# Altium PCB lm2596PCB.PcbDoc
Units mm, origin at the board's own origin, x right, y up, seen from the top; angles counter-clockwise.
Board outline 52.58 x 24.89 mm, 2 copper layers (Top Layer, Bottom Layer); 9 components, 5 nets, 23 pads, 2 vias.
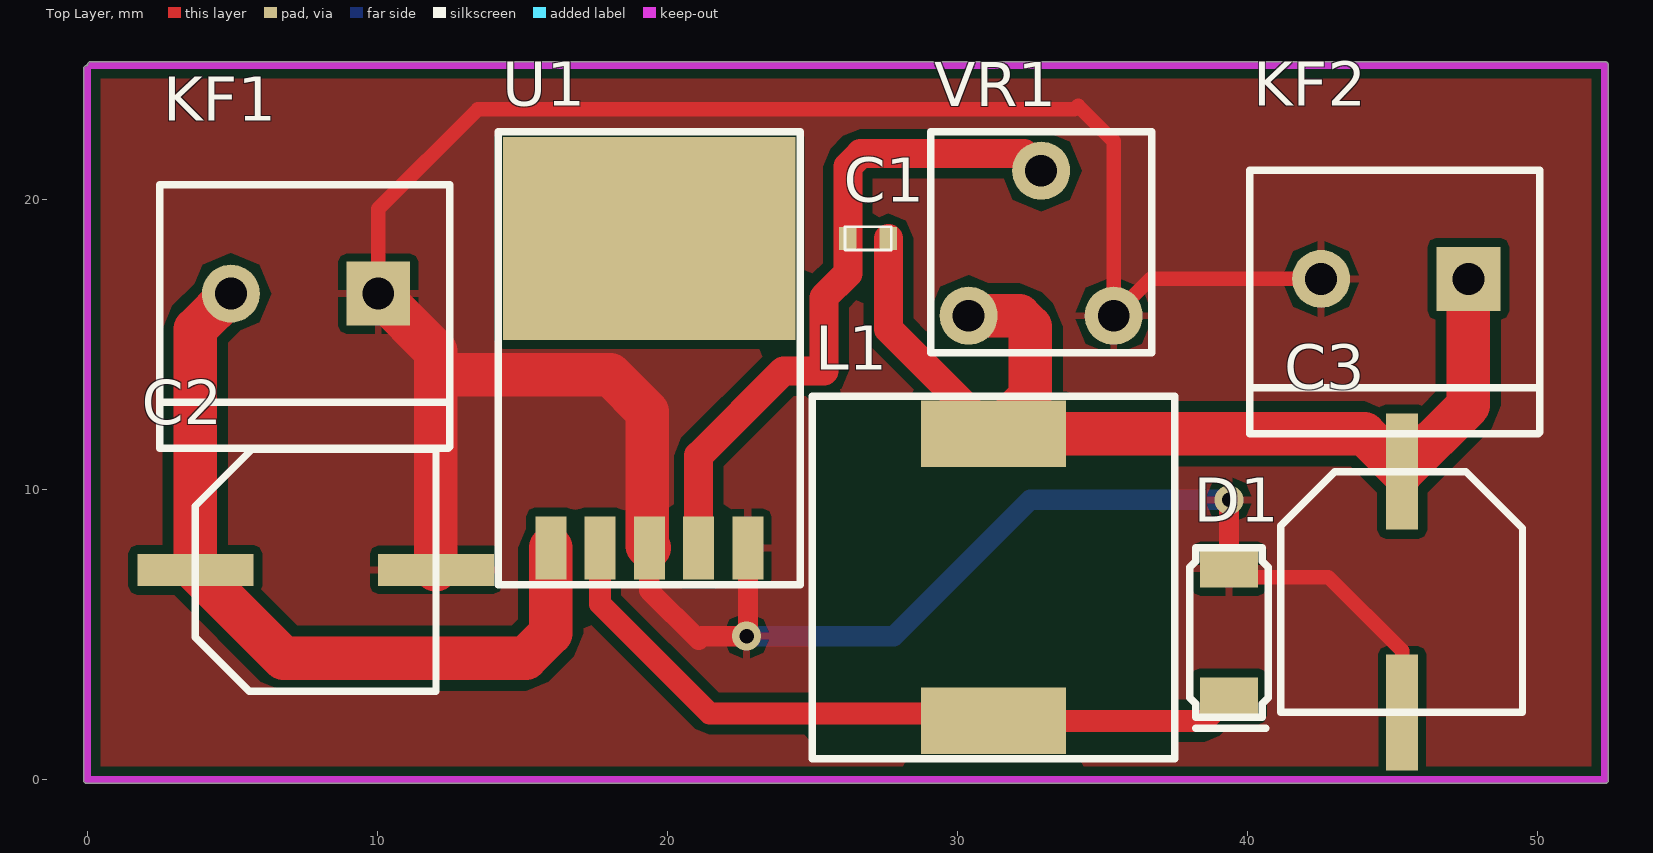
[diagram p0: Top Layer view]
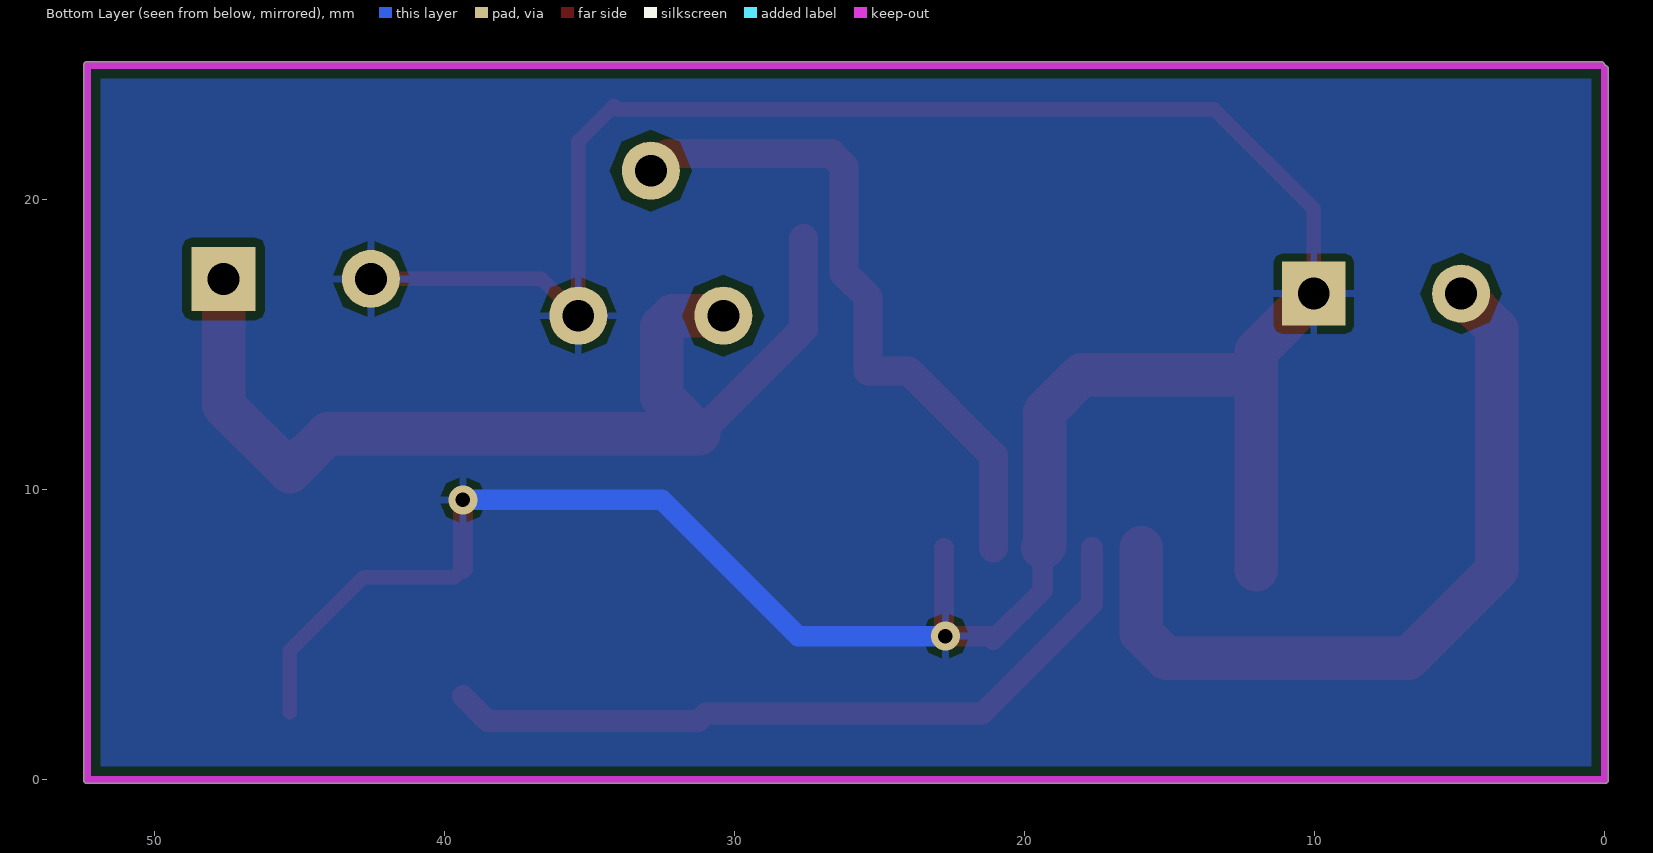
[diagram p1: Bottom Layer view, seen from below]
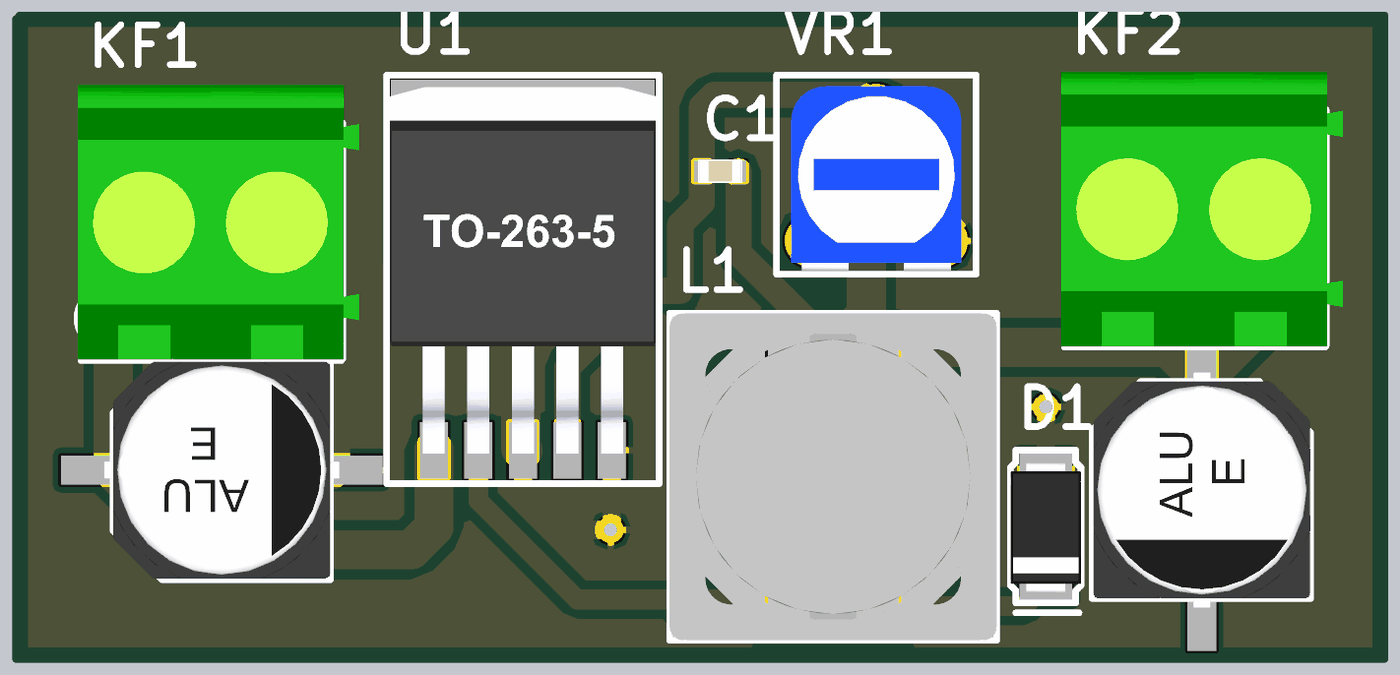
[diagram p2: 3D render of the assembled board from above, using the file's embedded part models]

## Layer stack, top to bottom
Top Solder: solder mask 0.0102, Solder Resist, Dk 3.5
Top Layer: signal copper 0.0356
Dielectric 1: dielectric 0.32, FR-4, Dk 4.8
Bottom Layer: signal copper 0.0356
Bottom Solder: solder mask 0.0102, Solder Resist, Dk 3.5

## Board outline
-0.127,0 -0.127,24.511 cw(c0,24.511) 0,24.638 cw(c0.127,24.638) 0.127,24.765 52.324,24.765 cw(c52.324,24.638) 52.451,24.638 52.451,0 cw(c52.324,0) 52.324,-0.127 0,-0.127 cw(c0,0)

## Design rules (kind name [scope] priority, off if disabled: settings)
Clearance [All] p1: gap=0.3 ignorepadtopadclearanceinfootprint=FALSE
PolygonConnect PolygonConnect_1 [All] p1: connectstyle=Relief reliefconductorwidth=0.254 reliefentries=4 polygonreliefangle="90 Angle" airgapwidth=0.254
PolygonConnect [All vs IsRegion] p2: connectstyle=Direct reliefconductorwidth=0.254 reliefentries=4 polygonreliefangle="90 Angle" airgapwidth=0.254
RoutingVias [All] p1: holewidth=0.5 width=1 viastyle="Through Hole" minholewidth=0.5 minwidth=1 maxholewidth=0.5 maxwidth=1
SolderMaskExpansion [All] p1: expansion=0.102
Width Vin [All] p1: maxlimit=1.5 minlimit=0.5 preferedwidth=1
Width Vout [InNet('Vout')] p2: maxlimit=1.5 minlimit=0.5 preferedwidth=1
Width [All] p3: maxlimit=2 minlimit=0.3 preferedwidth=0.5
30 further rules are at their usual default settings.

## Components (designator, comment, footprint, x,y, rotation, side; value= is the part's Value field where it differs from the comment)
C1 "100pF" "C104 0603 SMD" 26.924,18.669 r180 top
C2 "100uF/50V" UUD1H101MNL1GS 7.874,7.239 r90 top
C3 "100uF/50V" UUD1H101MNL1GS 45.339,6.477 r0 top
D1 "1N5825" SS34-SMA 39.37,5.08 r180 top
KF1 "Cin" KF126 7.493,16.764 r180 top
KF2 "Cout" KF126 45.085,17.272 r180 top
L1 "470UH" RH127-471 31.242,6.982 r0 top
U1 "LM2596-ADJ" TO263-5 19.382,7.994 r270 top
VR1 "10K" RM065-203 32.893,16.002 r0 top

## Footprints (in the part's own frame and the unit in brackets; to place one, negate y for a bottom-side part, rotate by r counter-clockwise, add the part's x,y. Pads: shape width x height; smd on the part's side, far side on the other; paste and mask are expansions set on the pad)
"C104 0603 SMD" [mm]
  rect 0.6x0.8 smd: 1(-0.7,0) 2(0.7,0)
  silkscreen extent -0.8,-0.4 0.8,0.4, body extent -0.8,-0.4 0.8,0.4
KF126 [mm]
  rect 2.2x2.2 hole 1.1: 1(-2.54,0)
  round 2 hole 1.1: 2(2.54,0)
  silkscreen extent -5,-3.75 5,5.33, body extent -5.63,-5.21 5.13,5.29, height 14.85
RH127-471 [mm]
  rect 5x2.3 smd: 1(0,-4.95) 2(0,4.95)
  silkscreen extent -6.25,-6.25 6.25,6.25, body extent -6.25,-6.25 6.25,6.25, height 5.8
RM065-203 [mm]
  round 2 hole 1.1: 1(-2.5,0) 2(0,5) 3(2.5,0)
  silkscreen extent -3.81,-1.27 3.81,6.35, body extent -3.25,-1.13 3.25,5.92, height 7
SS34-SMA [mm]
  rect 2x1.3 smd: 1(0,-2.2) 2(0,2.2)
  silkscreen extent -1.35,-2.92 1.35,3.3, body extent -1.35,-2.46 1.35,2.54, height 2.3
TO263-5 [mm]
  rect 2.16x1.07 smd: 1(0,-3.4) 2(0,-1.7) 3(0,0) 4(0,1.7) 5(0,3.4)
  rect 6.99x10.08 smd: 6(-10.675,0)
  silkscreen extent -14.35,-5.21 1.27,5.21, body extent -13.89,-5.08 0.13,5.08, height 4.56
UUD1H101MNL1GS [mm]
  rect 1.1x4 smd: 1(0,4.15) 2(0,-4.15)
  silkscreen extent -4.19,-4.15 4.15,4.15, body extent -4.15,-4.5 4.15,4.5, height 6.2

## Part data
C1: library part "C104 SMD", "0603 SMD CAP", Supplier Part Number 2=478-1175-1-ND
C2 C3: "CAP ALUM 100UF 50V SMD", Supplier Part Number 1=493-2306-1-ND, Supplier 1=Digi-Key
D1: library part "Schottky 3A 40V SMA", "DIODE SCHOTTKY 3A 40V SMA", Supplier Part Number 1=B340LA-FDICT-ND, Supplier 1=Digi-Key
KF1 KF2: library part KF2, "2P-KF126 Domino"
L1: library part "L SMD", "470UH 0.79A, Size 12 x 12 x 8, SMD Inductor", Supplier Part Number 1=595-1460-1-ND, Supplier 1=Digi-Key
U1: library part LM2596, "IC BUCK ADJ 3A TO263-5", Supplier Part Number 1=LM2596S-ADJ/NOPB-ND, Supplier 1=Digi-Key
VR1: library part "VR Res"

## Via types
v1: diameter 1, hole 0.5, Top Layer to Bottom Layer, 2 vias

## Nets (pads, with @x,y where several pads share a name; then routed paths per layer and width w, separated by ;. In a path a pad name is that pad's centre, name@x,y a point inside that pad or via, vN(x,y) a via of type N, cw(c..) or ccw(c..) an arc to the next point about the centre after c; other vN are vias at no path point)
GND: C2.2 C3.2 D1.1 KF1.1 KF2.2 U1.3 U1.5 VR1.3 | length 105.7
  Top Layer w0.5: KF1.1 10.033,19.685 13.462,23.114 34.036,23.114 34.163,23.241 35.393,22.011 VR1.3 36.663,17.272 KF2.2 ; D1.1 39.665,6.985 42.799,6.985 45.339,4.445 C3.2
  Top Layer w0.7: U1.3 19.382,6.526 21.082,4.826 21.209,4.953 v1(22.733,4.953) 22.782,5.002 U1.5 ; D1.1 v1(39.37,9.652)
  Top Layer w1.5: KF1.1 12.024,14.773 12.024,13.97 ; C2.2 12.024,13.97 ; U1.3 19.304,8.072 19.304,12.7 18.034,13.97 12.024,13.97
  Bottom Layer w0.7: v1(22.733,4.953) 27.813,4.953 32.512,9.652 v1(39.37,9.652)
NetC1_2: C1.2 U1.4 VR1.2 | length 23.2
  Top Layer w1: U1.4 21.082,11.176 24.003,14.097 25.4,14.097 25.4,16.637 26.224,17.461 C1.2 26.224,21.144 26.67,21.59 32.305,21.59 VR1.2
NetD1_2: D1.2 L1.1 U1.2 | length 25.6
  Top Layer w0.762: U1.2 17.682,6.067 21.463,2.286 30.988,2.286 L1.1 38.522,2.032 D1.2
Vin: C2.1 KF1.2 U1.1 | length 26.8
  Top Layer w1.5: KF1.2 3.724,15.535 C2.1 6.772,4.191 15.113,4.191 15.982,5.06 U1.1
Vout: C1.1 C3.1 KF2.1 L1.2 VR1.1 | length 37
  Top Layer w1: C1.1 27.624,15.55 L1.2
  Top Layer w1.5: VR1.1 32.131,16.002 32.512,15.621 32.512,13.202 L1.2 44.034,11.932 C3.1 47.625,12.913 KF2.1
pads on no net: U1.6

## Polygon pours and split planes (outlines as drawn)
GND on Bottom Layer "Botton Layer-No Net 1" (solid, pour order 4): 0,24.511 0.127,24.638 52.324,24.638 52.324,0 0,0
GND on Top Layer "Botton Layer-No Net 1" (solid, pour order 0): 0,24.511 0.127,24.384 52.324,24.384 52.324,0 0,0

## Keep-outs
Keep-Out Layer:
  lines w0.254: 0,24.511 0,0 52.324,0 52.324,24.638 39.275,24.638 13.176,24.638 0.127,24.638

## Other copper
Top Layer:
  pour cut-out: 25.019,13.208 37.338,13.208 37.465,13.081 37.465,0.762 24.892,0.762